# EAGLE board line-sensor-var1a-r3-2019-10-06 (EAGLE 9.5.1)
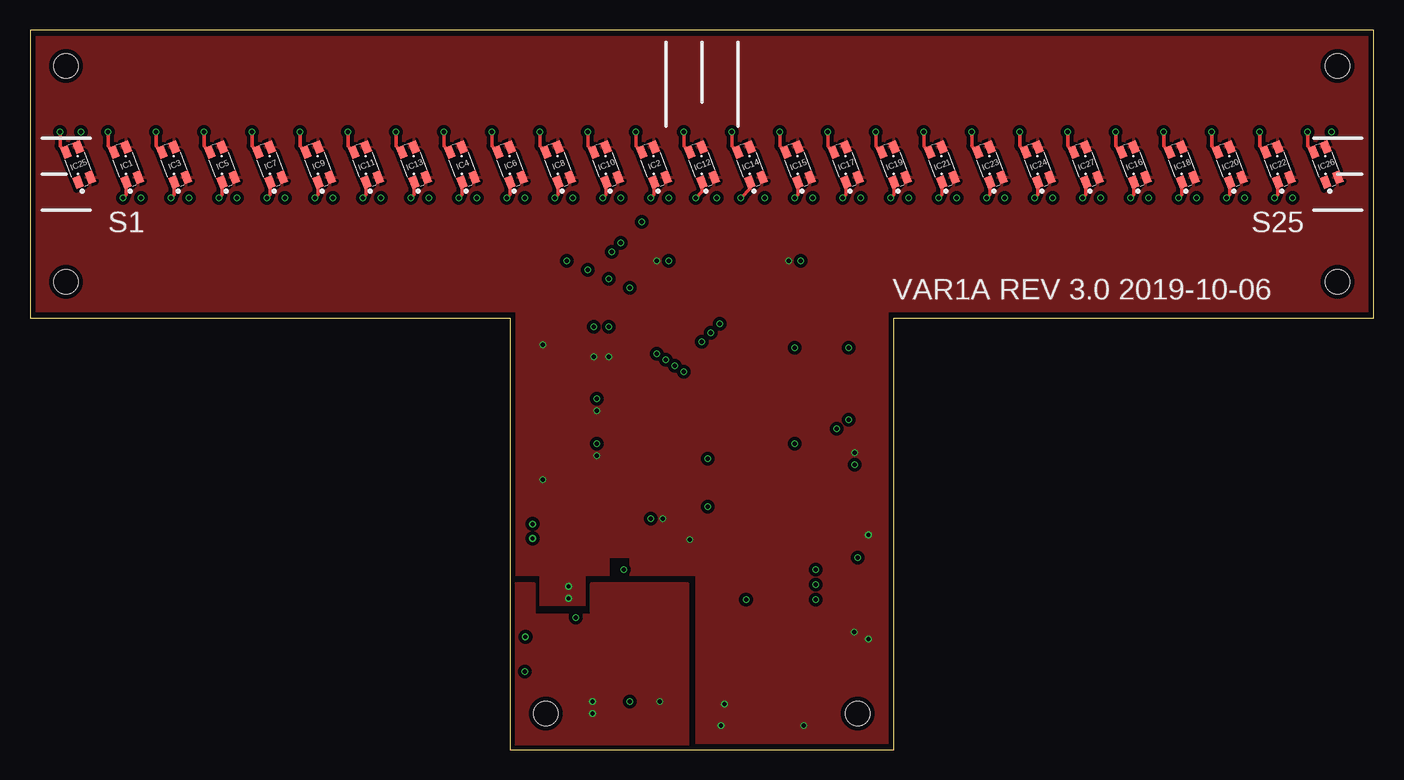
[diagram p0: board, top side]
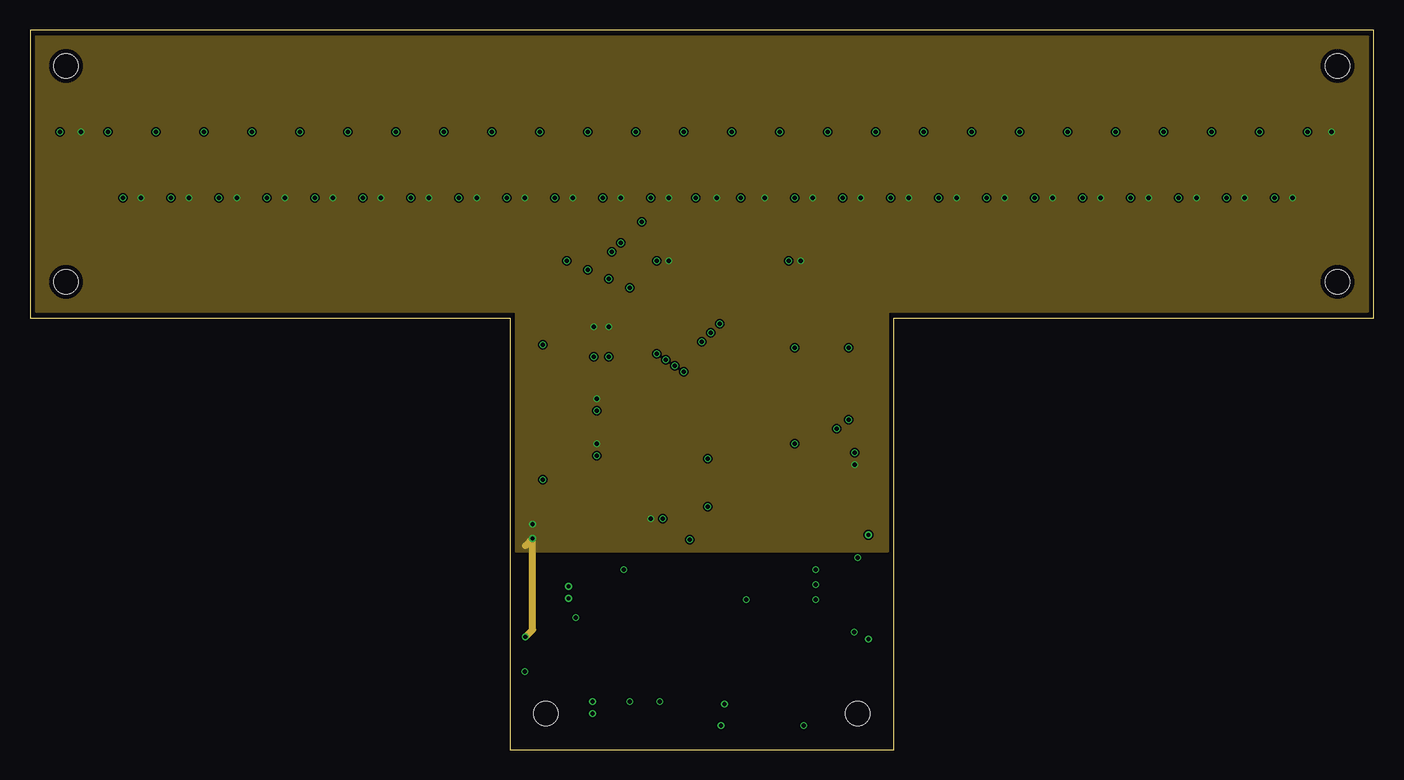
[diagram p1: board, inner layer Route2]
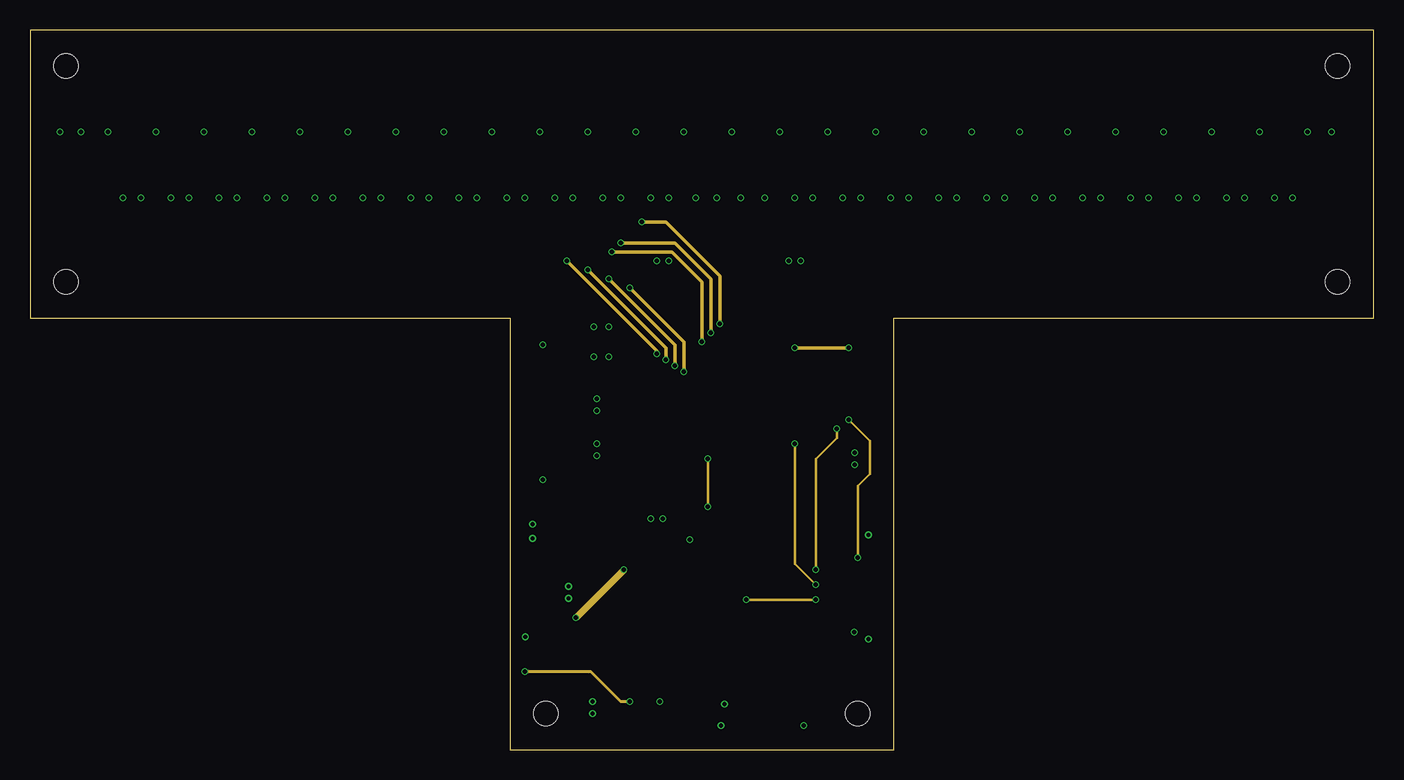
[diagram p2: board, inner layer Route15]
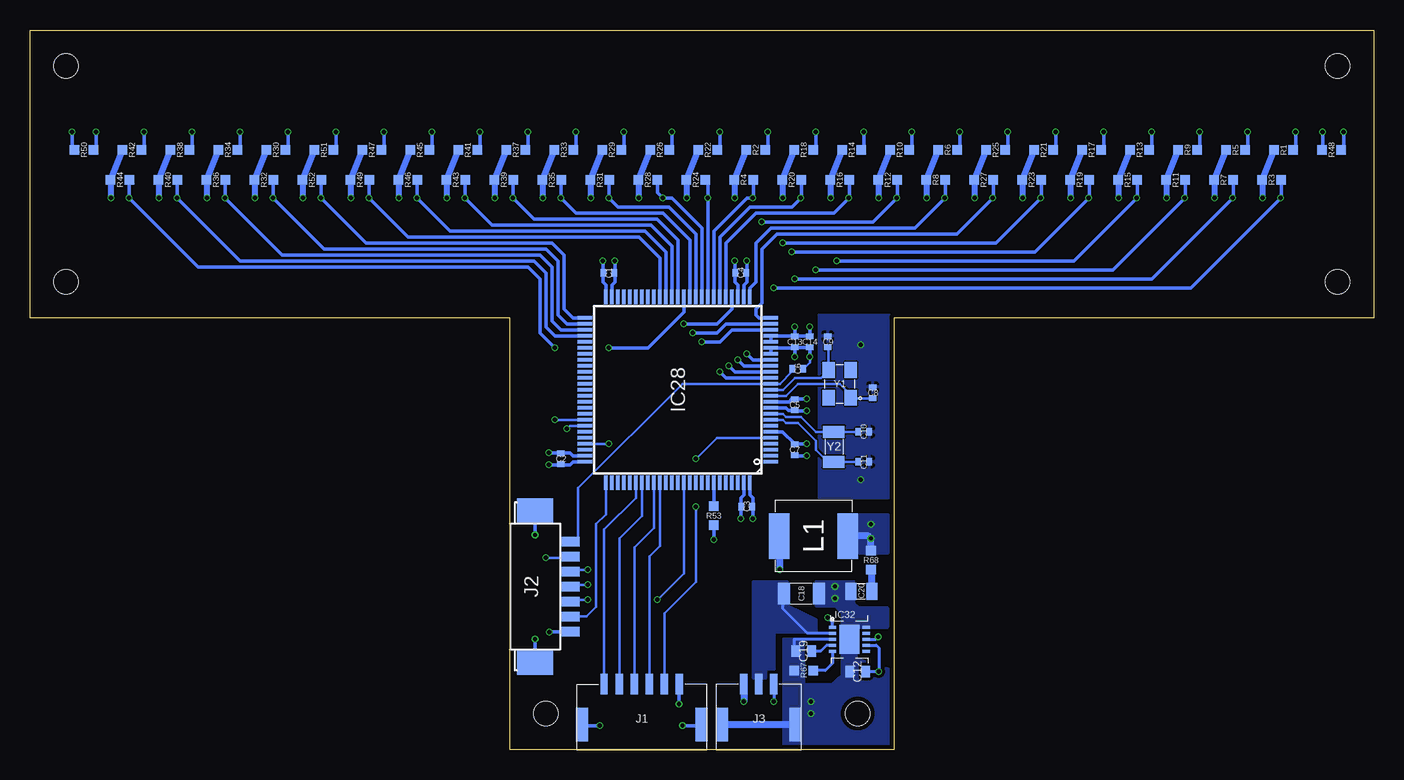
[diagram p3: board, bottom side, seen from below]

Size 112 x 60 mm. Coordinates in mm from the lower left corner, seen from the top.
Outline: 0,36 40,36 40,0 72,0 72,36 112,36 112,60 0,60 0,36
Copper layers (1*2*15*16): Top 0.035559375mm / dielectric 0.17018125mm / Route2 0.01778125mm / dielectric 47mil / Route15 0.01778125mm / dielectric 0.17018125mm / Bottom 0.035559375mm
Design rules "oshpark-4layer": minimum track width 5mil, minimum drill 10mil, track to track 5mil, track to pad 5mil, pad to pad 5mil, via to via 5mil, smd to smd 5mil, copper to edge 15mil, drill to drill 6mil, minimum pad ring 4mil, minimum via ring 4mil, stop-mask expansion 2.5mil, vias tented up to drill 0mil, thermal gap 10mil
Net classes: 1 ground: width 0.3 mm; 2 3v3: width 0.3 mm
Holes 2 mm at 3,57 3,39 109,57 109,39 43,3 69,3

## Footprints (pad centres in the part's own frame; a part is rotated, then mirrored left to right if it is on the bottom)
CAPACITOR-0402 = smd 0.47 x 0.6: P$1 -0.46,0; P$2 0.46,0
CAPACITOR-0603 = smd 0.7 x 0.95: 1 -0.675,0; 2 0.675,0
CAPACITOR-1206 = smd 1 x 1.8: P$1 -1.45,0; P$2 1.45,0
CAPACITOR-0805 = smd 0.9 x 1.4: 1 -0.875,0; 2 0.875,0
GP2S60 = smd 1 x 0.65: 1 -0.65,0.25; 2 -0.65,-0.85; 3 2.05,-0.85; 4 2.05,0.25
LQFP100_14X14 = smd 0.3 x 1.2: 1 -6,-7.75; 2 -5.5,-7.75; 3 -5,-7.75; 4 -4.5,-7.75; 5 -4,-7.75; 6 -3.5,-7.75; 7 -3,-7.75; 8 -2.5,-7.75; 9 -2,-7.75; 10 -1.5,-7.75; 11 -1,-7.75; 12 -0.5,-7.75; 13 0,-7.75; 14 0.5,-7.75; 15 1,-7.75; 16 1.5,-7.75; 17 2,-7.75; 18 2.5,-7.75; 19 3,-7.75; 20 3.5,-7.75; 21 4,-7.75; 22 4.5,-7.75; 23 5,-7.75; 24 5.5,-7.75; 25 6,-7.75; 51 6,7.75; 52 5.5,7.75; 53 5,7.75; 54 4.5,7.75; 55 4,7.75; 56 3.5,7.75; 57 3,7.75; 58 2.5,7.75; 59 2,7.75; 60 1.5,7.75; 61 1,7.75; 62 0.5,7.75; 63 0,7.75; 64 -0.5,7.75; 65 -1,7.75; 66 -1.5,7.75; 67 -2,7.75; 68 -2.5,7.75; 69 -3,7.75; 70 -3.5,7.75; 71 -4,7.75; 72 -4.5,7.75; 73 -5,7.75; 74 -5.5,7.75; 75 -6,7.75 | smd 1.2 x 0.3: 26 7.75,-6; 27 7.75,-5.5; 28 7.75,-5; 29 7.75,-4.5; 30 7.75,-4; 31 7.75,-3.5; 32 7.75,-3; 33 7.75,-2.5; 34 7.75,-2; 35 7.75,-1.5; 36 7.75,-1; 37 7.75,-0.5; 38 7.75,0; 39 7.75,0.5; 40 7.75,1; 41 7.75,1.5; 42 7.75,2; 43 7.75,2.5; 44 7.75,3; 45 7.75,3.5; 46 7.75,4; 47 7.75,4.5; 48 7.75,5; 49 7.75,5.5; 50 7.75,6; 76 -7.75,6; 77 -7.75,5.5; 78 -7.75,5; 79 -7.75,4.5; 80 -7.75,4; 81 -7.75,3.5; 82 -7.75,3; 83 -7.75,2.5; 84 -7.75,2; 85 -7.75,1.5; 86 -7.75,1; 87 -7.75,0.5; 88 -7.75,0; 89 -7.75,-0.5; 90 -7.75,-1; 91 -7.75,-1.5; 92 -7.75,-2; 93 -7.75,-2.5; 94 -7.75,-3; 95 -7.75,-3.5; 96 -7.75,-4; 97 -7.75,-4.5; 98 -7.75,-5; 99 -7.75,-5.5; 100 -7.75,-6
VSON-10-0.5MM = smd 0.6 x 0.24: 1 -1.4,1; 2 -1.4,0.5; 3 -1.4,0; 4 -1.4,-0.5; 5 -1.4,-1; 6 1.4,-1; 7 1.4,-0.5; 8 1.4,0; 9 1.4,0.5; 10 1.4,1 | smd 1.65 x 2.4: PAD 0,0
MOLEX-502382-06XX = smd 0.6 x 1.7: 1 -3.125,-5.45; 2 -1.875,-5.45; 3 -0.625,-5.45; 4 0.625,-5.45; 5 1.875,-5.45; 6 3.145,-5.45 | smd 1 x 2.8: G1 -4.975,-2.1; G2 4.975,-2.1
MOLEX-53261-0771 = smd 0.8 x 1.6: 1 -3.75,-0.8; 2 -2.5,-0.8; 3 -1.25,-0.8; 4 0,-0.8; 5 1.25,-0.8; 6 2.5,-0.8; 7 3.75,-0.8 | smd 2.1 x 3: G1 -6.3,-3.7; G2 6.3,-3.7
MOLEX-502382-03XX = smd 0.6 x 1.7: 1 -1.25,-5.45; 2 0,-5.45; 3 1.25,-5.45 | smd 1 x 2.8: G1 -3.05,-2.1; G2 3.05,-2.1
PANASONIC-SERIES-H = smd 1.7 x 3.8: 1 -2.85,0; 2 2.85,0
RESISTOR-0603 = smd 0.8 x 0.8: P$1 -0.8,0; P$2 0.8,0
KYOCERA-CX3225GB24000D0HEQ = smd 1.3 x 1.05: 1 -1.15,-0.925; 2 1.15,0.925; NC1 -1.15,0.925; NC2 1.15,-0.925
NDK-NX3215SA = smd 1 x 1.8: 1 -1.25,0; 2 1.25,0

## Placement (x,y rotation side)
C1  0.1u 10V X7R  [CAPACITOR-0402]  63.75,39.75 0 bottom
C2  0.1u 10V X7R  [CAPACITOR-0402]  67.75,24.25 90 bottom
C3  0.1u 10V X7R  [CAPACITOR-0402]  52.25,20.25 180 bottom
C4  0.1u 10V X7R  [CAPACITOR-0402]  52.75,39.75 0 bottom
C5  0.1u 10V X7R  [CAPACITOR-0402]  48.25,28.75 270 bottom
C6  0.1u 10V X7R  [CAPACITOR-0402]  48,31.75 0 bottom
C7  0.1u 10V X7R  [CAPACITOR-0402]  48.25,25 270 bottom
C8  6p  [CAPACITOR-0402]  41.75,29.75 90 bottom
C9  6p  [CAPACITOR-0402]  45.5,34 90 bottom
C10  2p  [CAPACITOR-0402]  42.5,26.5 0 bottom
C11  2p  [CAPACITOR-0402]  42.5,24 0 bottom
C12  1u 16V X7R  [CAPACITOR-0603]  43,6.5 180 bottom
C13  0.1u 10V X7R  [CAPACITOR-0402]  48.25,34 270 bottom
C14  1u 10V X7R  [CAPACITOR-0402]  47,34 270 bottom
C18  1u 50V X7R  [CAPACITOR-1206]  47.7,13 0 bottom
C19  33n 10V X7R  [CAPACITOR-0603]  47.5,8.2 180 bottom
C20  22u 10V X7S  [CAPACITOR-0805]  42.7,13.2 180 bottom
IC1  GP2S60  [GP2S60]  8,48 111.8 top
IC2  GP2S60  [GP2S60]  52,48 111.8 top
IC3  GP2S60  [GP2S60]  12,48 111.8 top
IC4  GP2S60  [GP2S60]  36,48 111.8 top
IC5  GP2S60  [GP2S60]  16,48 111.8 top
IC6  GP2S60  [GP2S60]  40,48 111.8 top
IC7  GP2S60  [GP2S60]  20,48 111.8 top
IC8  GP2S60  [GP2S60]  44,48 111.8 top
IC9  GP2S60  [GP2S60]  24,48 111.8 top
IC10  GP2S60  [GP2S60]  48,48 111.8 top
IC11  GP2S60  [GP2S60]  28,48 111.8 top
IC12  GP2S60  [GP2S60]  56,48 111.8 top
IC13  GP2S60  [GP2S60]  32,48 111.8 top
IC14  GP2S60  [GP2S60]  60,48 111.8 top
IC15  GP2S60  [GP2S60]  64,48 111.8 top
IC16  GP2S60  [GP2S60]  92,48 111.8 top
IC17  GP2S60  [GP2S60]  68,48 111.8 top
IC18  GP2S60  [GP2S60]  96,48 111.8 top
IC19  GP2S60  [GP2S60]  72,48 111.8 top
IC20  GP2S60  [GP2S60]  100,48 111.8 top
IC21  GP2S60  [GP2S60]  76,48 111.8 top
IC22  GP2S60  [GP2S60]  104,48 111.8 top
IC23  GP2S60  [GP2S60]  80,48 111.8 top
IC24  GP2S60  [GP2S60]  84,48 111.8 top
IC25  GP2S60  [GP2S60]  4,48 111.8 top
IC26  GP2S60  [GP2S60]  108,48 111.8 top
IC27  GP2S60  [GP2S60]  88,48 111.8 top
IC28  STM32L151VE  [LQFP100_14X14]  58,30 90 bottom
IC32  LM5165YDRCR  [VSON-10-0.5MM]  43.7,9.2 0 bottom
J1  MOLEX-502382-06XX  [MOLEX-502382-06XX]  61,0 180 bottom
J2  MOLEX-53261-0771  [MOLEX-53261-0771]  66.2,13.6 270 bottom
J3  MOLEX-502382-03XX  [MOLEX-502382-03XX]  51.25,0 180 bottom
L1  150u 0.86R 0.35A  [PANASONIC-SERIES-H]  46.7,17.8 0 bottom
R1  1.5k  [RESISTOR-0603]  7.5,50 180 bottom
R2  1.5k  [RESISTOR-0603]  51.5,50 180 bottom
R3  220k  [RESISTOR-0603]  8.5,47.5 180 bottom
R4  220k  [RESISTOR-0603]  52.5,47.5 180 bottom
R5  1.5k  [RESISTOR-0603]  11.5,50 180 bottom
R6  1.5k  [RESISTOR-0603]  35.5,50 180 bottom
R7  220k  [RESISTOR-0603]  12.5,47.5 180 bottom
R8  220k  [RESISTOR-0603]  36.5,47.5 180 bottom
R9  1.5k  [RESISTOR-0603]  15.5,50 180 bottom
R10  1.5k  [RESISTOR-0603]  39.5,50 180 bottom
R11  220k  [RESISTOR-0603]  16.5,47.5 180 bottom
R12  220k  [RESISTOR-0603]  40.5,47.5 180 bottom
R13  1.5k  [RESISTOR-0603]  19.5,50 180 bottom
R14  1.5k  [RESISTOR-0603]  43.5,50 180 bottom
R15  220k  [RESISTOR-0603]  20.5,47.5 180 bottom
R16  220k  [RESISTOR-0603]  44.5,47.5 180 bottom
R17  1.5k  [RESISTOR-0603]  23.5,50 180 bottom
R18  1.5k  [RESISTOR-0603]  47.5,50 180 bottom
R19  220k  [RESISTOR-0603]  24.5,47.5 180 bottom
R20  220k  [RESISTOR-0603]  48.5,47.5 180 bottom
R21  1.5k  [RESISTOR-0603]  27.5,50 180 bottom
R22  1.5k  [RESISTOR-0603]  55.5,50 180 bottom
R23  220k  [RESISTOR-0603]  28.5,47.5 180 bottom
R24  220k  [RESISTOR-0603]  56.5,47.5 180 bottom
R25  1.5k  [RESISTOR-0603]  31.5,50 180 bottom
R26  1.5k  [RESISTOR-0603]  59.5,50 180 bottom
R27  220k  [RESISTOR-0603]  32.5,47.5 180 bottom
R28  220k  [RESISTOR-0603]  60.5,47.5 180 bottom
R29  1.5k  [RESISTOR-0603]  63.5,50 180 bottom
R30  1.5k  [RESISTOR-0603]  91.5,50 180 bottom
R31  220k  [RESISTOR-0603]  64.5,47.5 180 bottom
R32  220k  [RESISTOR-0603]  92.5,47.5 180 bottom
R33  1.5k  [RESISTOR-0603]  67.5,50 180 bottom
R34  1.5k  [RESISTOR-0603]  95.5,50 180 bottom
R35  220k  [RESISTOR-0603]  68.5,47.5 180 bottom
R36  220k  [RESISTOR-0603]  96.5,47.5 180 bottom
R37  1.5k  [RESISTOR-0603]  71.5,50 180 bottom
R38  1.5k  [RESISTOR-0603]  99.5,50 180 bottom
R39  220k  [RESISTOR-0603]  72.5,47.5 180 bottom
R40  220k  [RESISTOR-0603]  100.5,47.5 180 bottom
R41  1.5k  [RESISTOR-0603]  75.5,50 180 bottom
R42  1.5k  [RESISTOR-0603]  103.5,50 180 bottom
R43  220k  [RESISTOR-0603]  76.5,47.5 180 bottom
R44  220k  [RESISTOR-0603]  104.5,47.5 180 bottom
R45  1.5k  [RESISTOR-0603]  79.5,50 180 bottom
R46  220k  [RESISTOR-0603]  80.5,47.5 180 bottom
R47  1.5k  [RESISTOR-0603]  83.5,50 180 bottom
R48  1.5k  [RESISTOR-0603]  3.5,50 180 bottom
R49  220k  [RESISTOR-0603]  84.5,47.5 180 bottom
R50  1.5k  [RESISTOR-0603]  107.5,50 180 bottom
R51  1.5k  [RESISTOR-0603]  87.5,50 180 bottom
R52  220k  [RESISTOR-0603]  88.5,47.5 180 bottom
R53  100k  [RESISTOR-0603]  55,19.5 270 bottom
R67  121k 1%  [RESISTOR-0603]  47.5,6.6 180 bottom
R68  0.5 5%  [RESISTOR-0603]  41.9,15.8 270 bottom
Y1  CRYSTALKYOCERA-CX3225GB24000D0HEQ  [KYOCERA-CX3225GB24000D0HEQ]  44.5,30.5 90 bottom
Y2  CRYSTALNDK-NX3215SA  [NDK-NX3215SA]  45,25.25 270 bottom

## Library data of the parts
C1-C10 C12-C14 C18-C20 L1 R1-R53 R67 R68 Y1 Y2 = passives
C11 = passives; SPICEPREFIX: C
IC1-IC27 = sensors
IC28 = mcu
IC32 = voltage-regulator
J1-J3 = connectors

## Nets
!RST: C6.P$1 IC28.14 J2.1
BOOT0: IC28.94 R53.P$1
GND: C1.P$2 C2.P$2 C3.P$2 C4.P$2 C5.P$2 C6.P$2 C7.P$2 C8.P$2 C9.P$2 C10.P$2 C11.P$2 C12.2 C13.P$2 C14.P$2 C18.P$2 C19.2 C20.2 IC1.2 IC1.3 IC2.2 IC2.3 IC3.2 IC3.3 IC4.2 IC4.3 IC5.2 IC5.3 IC6.2 IC6.3 IC7.2 IC7.3 IC8.2 IC8.3 IC9.2 IC9.3 IC10.2 IC10.3 IC11.2 IC11.3 IC12.2 IC12.3 IC13.2 IC13.3 IC14.2 IC14.3 IC15.2 IC15.3 IC16.2 IC16.3 IC17.2 IC17.3 IC18.2 IC18.3 IC19.2 IC19.3 IC20.2 IC20.3 IC21.2 IC21.3 IC22.2 IC22.3 IC23.2 IC23.3 IC24.2 IC24.3 IC25.2 IC25.3 IC26.2 IC26.3 IC27.2 IC27.3 IC28.10 IC28.19 IC28.20 IC28.27 IC28.49 IC28.74 IC28.99 IC32.3 IC32.10 IC32.PAD J1.1 J1.G1 J1.G2 J2.7 J2.G1 J2.G2 J3.3 J3.G1 J3.G2 R53.P$2 R67.P$2
IC32_SW: IC32.1 L1.1
N$1: IC3.4 R5.P$1
N$2: IC1.4 R1.P$1
N$3: IC5.4 R9.P$1
N$4: IC7.4 R13.P$1
N$5: IC9.4 R17.P$1
N$6: IC11.4 R21.P$1
N$7: IC13.4 R25.P$1
N$8: IC4.4 R6.P$1
N$9: IC6.4 R10.P$1
N$10: IC8.4 R14.P$1
N$11: IC10.4 R18.P$1
N$12: IC2.4 R2.P$1
N$13: IC12.4 R22.P$1
N$14: IC14.4 R26.P$1
N$15: IC15.4 R29.P$1
N$16: IC17.4 R33.P$1
N$17: IC19.4 R37.P$1
N$18: IC21.4 R41.P$1
N$19: IC23.4 R45.P$1
N$20: IC24.4 R47.P$1
N$21: IC27.4 R51.P$1
N$22: IC16.4 R30.P$1
N$23: IC18.4 R34.P$1
N$24: IC20.4 R38.P$1
N$25: IC22.4 R42.P$1
N$30: IC26.4 R50.P$1
N$31: IC25.4 R48.P$1
N$33: C8.P$1 IC28.12 Y1.1
N$34: C9.P$1 IC28.13 Y1.2
N$35: IC32.5 R67.P$1
N$36: C10.P$1 IC28.9 Y2.1
N$37: C11.P$1 IC28.8 Y2.2
N$40: C19.1 IC32.4
N$42: C20.1 R68.P$2
PWR_ENABLE: C12.1 IC32.7 J3.1
SENSOR_1: IC1.1 IC28.15 R3.P$1
SENSOR_2: IC3.1 IC28.16 R7.P$1
SENSOR_3: IC5.1 IC28.17 R11.P$1
SENSOR_4: IC7.1 IC28.18 R15.P$1
SENSOR_5: IC9.1 IC28.23 R19.P$1
SENSOR_6: IC11.1 IC28.24 R23.P$1
SENSOR_7: IC13.1 IC28.25 R27.P$1
SENSOR_8: IC4.1 IC28.26 R8.P$1
SENSOR_9: IC6.1 IC28.29 R12.P$1
SENSOR_10: IC8.1 IC28.30 R16.P$1
SENSOR_11: IC10.1 IC28.31 R20.P$1
SENSOR_12: IC2.1 IC28.32 R4.P$1
SENSOR_13: IC12.1 IC28.33 R24.P$1
SENSOR_14: IC14.1 IC28.34 R28.P$1
SENSOR_15: IC15.1 IC28.35 R31.P$1
SENSOR_16: IC17.1 IC28.36 R35.P$1
SENSOR_17: IC19.1 IC28.38 R39.P$1
SENSOR_18: IC21.1 IC28.39 R43.P$1
SENSOR_19: IC23.1 IC28.40 R46.P$1
SENSOR_20: IC24.1 IC28.41 R49.P$1
SENSOR_21: IC27.1 IC28.51 R52.P$1
SENSOR_22: IC16.1 IC28.52 R32.P$1
SENSOR_23: IC18.1 IC28.53 R36.P$1
SENSOR_24: IC20.1 IC28.54 R40.P$1
SENSOR_25: IC22.1 IC28.37 R44.P$1
SPI2_!SS: IC28.81 J1.6
SPI2_MISO: IC28.84 J1.4
SPI2_MOSI: IC28.85 J1.3
SPI2_SCK: IC28.82 J1.5
STLINK_SWO: IC28.89 J2.5
STLINK_TCK: IC28.76 J2.6
STLINK_TMS: IC28.72 J2.4
STLINK_USART1_RX: IC28.69 J2.3
STLINK_USART1_TX: IC28.68 J2.2
VBAT: C18.P$1 IC32.2 J3.2
VDD: C1.P$1 C2.P$1 C3.P$1 C4.P$1 C5.P$1 C7.P$1 C13.P$1 C14.P$1 IC28.6 IC28.11 IC28.21 IC28.22 IC28.28 IC28.50 IC28.75 IC28.100 IC32.8 L1.2 R1.P$2 R2.P$2 R3.P$2 R4.P$2 R5.P$2 R6.P$2 R7.P$2 R8.P$2 R9.P$2 R10.P$2 R11.P$2 R12.P$2 R13.P$2 R14.P$2 R15.P$2 R16.P$2 R17.P$2 R18.P$2 R19.P$2 R20.P$2 R21.P$2 R22.P$2 R23.P$2 R24.P$2 R25.P$2 R26.P$2 R27.P$2 R28.P$2 R29.P$2 R30.P$2 R31.P$2 R32.P$2 R33.P$2 R34.P$2 R35.P$2 R36.P$2 R37.P$2 R38.P$2 R39.P$2 R40.P$2 R41.P$2 R42.P$2 R43.P$2 R44.P$2 R45.P$2 R46.P$2 R47.P$2 R48.P$2 R49.P$2 R50.P$2 R51.P$2 R52.P$2 R68.P$1
WAKEUP: IC28.5 J1.2

## Tracks (layer width: path | path; a pad name or v marks a point on that pad's centre or on a via)
!RST
  Bottom 0.2: C6.P$1 48.46,31.54 49.5,30.5 IC28.14 57.6,30.5 66.3,21.8 66.3,17.3 66.95,17.3 J2.1
BOOT0
  Bottom 0.3: IC28.94 R53.P$1
GND  (via drill 0.35)
  Bottom 0.2: C6.P$2 47,32.29 v47,32.75
  Bottom 0.24: C19.2 48.3,8.25 48.3,9.2 IC32.3
  Bottom 0.3: v52.75,19.25 52.75,20.21 C3.P$2 52.75,20.29 52.75,21 52.5,21.25 IC28.99 | R53.P$2 v55,17.5 | IC28.74 66.75,24.5 67,24.75 67.71,24.75 C2.P$2 67.79,24.75 v68.75,24.75 | IC28.19 IC28.20 48.29,33.5 C13.P$2 | C13.P$2 C14.P$2 v47,32.75 | v47.25,28.25 48.21,28.25 C5.P$2 48.79,28.29 49,28.5 IC28.10 | C13.P$2 v48.25,32.75 | C7.P$2 48.21,24.5 v47.25,24.5 | J1.1 57.9,5.43 v57.9,3.8 | J1.G1 56.12,2 v57.6,2 | J1.G2 65.88,2 v64.5,2 | J2.G2 v69.9,9.2 | J2.7 67.05,9.8 v68.7,9.8 | J2.G1 v69.9,17.9 | IC28.27 52.5,38.75 52.25,39 52.25,39.71 C4.P$2 52.25,39.79 v52.25,40.75 | IC28.49 63.5,38.75 63.25,39 63.25,39.71 C1.P$2 63.25,39.79 v63.25,40.75
  Bottom 0.6: J3.G2 J3.G1 | J3.3 v52.5,4
  other vias: 44.9,12.6 44.9,13.6 46.9,4 46.9,3 42.75,33.75 42.75,22.5
  pour Bottom (isolate 0.24, no thermals): 47.5,9.2 49.2,9.2 49.2,0.2 40.2,0.2 40.2,6.6 43.1,7.57 43.1,8.2 44.3,8.2 44.3,6.19 45.2,5.4 47.5,5.4
  pour Bottom (no thermals): 44.3,10.2 40.5,10.2 40.5,11.8 42.9,11.8 43.3,12.2 43.3,14 46.5,14 46.5,12 44.9,12 44.3,11.4
  pour Top (isolate 0.3): 40.2,0.2 54.8,0.2 54.8,13.8 49.2,13.8 46.8,13.8 46.8,11.2 42,11.2 42,13.8 40.2,13.8
  pour Top (isolate 0.3): 111.5,59.5 111.5,36.5 71.5,36.5 71.5,0.5 55.5,0.5 55.5,14.5 50,14.5 50,16 48.25,16 48.25,14.5 46.25,14.5 46.25,12 42.5,12 42.5,14.5 40.5,14.5 40.5,36.5 0.5,36.5 0.5,59.5
  pour Bottom: 46.25,36.25 40.25,36.25 40.25,21 46.25,21
IC32_SW  (via drill 0.35)
  Route15 0.6: v49.5,15 v45.5,11
  Bottom 0.24: IC32.1 45.1,10.6 v45.5,11
  Bottom 0.6: v49.5,15 49.5,17.75 L1.1
N$1  (via drill 0.35)
  Top 0.3: v10.5,51.5 10.5,50.32 IC3.4
  Bottom 0.3: R5.P$1 10.5,50.2 v10.5,51.5
N$2  (via drill 0.35)
  Top 0.3: v6.5,51.5 6.5,50.32 IC1.4
  Bottom 0.3: R1.P$1 6.5,50.2 v6.5,51.5
N$3  (via drill 0.35)
  Top 0.3: v14.5,51.5 14.5,50.32 IC5.4
  Bottom 0.3: R9.P$1 14.5,50.2 v14.5,51.5
N$4  (via drill 0.35)
  Top 0.3: v18.5,51.5 18.5,50.32 IC7.4
  Bottom 0.3: R13.P$1 18.5,50.2 v18.5,51.5
N$5  (via drill 0.35)
  Top 0.3: v22.5,51.5 22.5,50.32 IC9.4
  Bottom 0.3: R17.P$1 22.5,50.2 v22.5,51.5
N$6  (via drill 0.35)
  Top 0.3: v26.5,51.5 26.5,50.32 IC11.4
  Bottom 0.3: R21.P$1 26.5,50.2 v26.5,51.5
N$7  (via drill 0.35)
  Top 0.3: v30.5,51.5 30.5,50.32 IC13.4
  Bottom 0.3: R25.P$1 30.5,50.2 v30.5,51.5
N$8  (via drill 0.35)
  Top 0.3: v34.5,51.5 34.5,50.32 IC4.4
  Bottom 0.3: R6.P$1 34.5,50.2 v34.5,51.5
N$9  (via drill 0.35)
  Top 0.3: v38.5,51.5 38.5,50.32 IC6.4
  Bottom 0.3: R10.P$1 38.5,50.2 v38.5,51.5
N$10  (via drill 0.35)
  Top 0.3: v42.5,51.5 42.5,50.32 IC8.4
  Bottom 0.3: R14.P$1 42.5,50.2 v42.5,51.5
N$11  (via drill 0.35)
  Top 0.3: v46.5,51.5 46.5,50.32 IC10.4
  Bottom 0.3: R18.P$1 46.5,50.2 v46.5,51.5
N$12  (via drill 0.35)
  Top 0.3: v50.5,51.5 50.5,50.32 IC2.4
  Bottom 0.3: R2.P$1 50.5,50.2 v50.5,51.5
N$13  (via drill 0.35)
  Top 0.3: v54.5,51.5 54.5,50.32 IC12.4
  Bottom 0.3: R22.P$1 54.5,50.2 v54.5,51.5
N$14  (via drill 0.35)
  Top 0.3: v58.5,51.5 58.5,50.32 IC14.4
  Bottom 0.3: R26.P$1 58.5,50.2 v58.5,51.5
N$15  (via drill 0.35)
  Top 0.3: v62.5,51.5 62.5,50.32 IC15.4
  Bottom 0.3: R29.P$1 62.5,50.2 v62.5,51.5
N$16  (via drill 0.35)
  Top 0.3: v66.5,51.5 66.5,50.32 IC17.4
  Bottom 0.3: R33.P$1 66.5,50.2 v66.5,51.5
N$17  (via drill 0.35)
  Top 0.3: v70.5,51.5 70.5,50.32 IC19.4
  Bottom 0.3: R37.P$1 70.5,50.2 v70.5,51.5
N$18  (via drill 0.35)
  Top 0.3: v74.5,51.5 74.5,50.32 IC21.4
  Bottom 0.3: R41.P$1 74.5,50.2 v74.5,51.5
N$19  (via drill 0.35)
  Top 0.3: v78.5,51.5 78.5,50.32 IC23.4
  Bottom 0.3: R45.P$1 78.5,50.2 v78.5,51.5
N$20  (via drill 0.35)
  Top 0.3: v82.5,51.5 82.5,50.32 IC24.4
  Bottom 0.3: R47.P$1 82.5,50.2 v82.5,51.5
N$21  (via drill 0.35)
  Top 0.3: v86.5,51.5 86.5,50.32 IC27.4
  Bottom 0.3: R51.P$1 86.5,50.2 v86.5,51.5
N$22  (via drill 0.35)
  Top 0.3: v90.5,51.5 90.5,50.32 IC16.4
  Bottom 0.3: R30.P$1 90.5,50.2 v90.5,51.5
N$23  (via drill 0.35)
  Top 0.3: v94.5,51.5 94.5,50.32 IC18.4
  Bottom 0.3: R34.P$1 94.5,50.2 v94.5,51.5
N$24  (via drill 0.35)
  Top 0.3: v98.5,51.5 98.5,50.32 IC20.4
  Bottom 0.3: R38.P$1 98.5,50.2 v98.5,51.5
N$25  (via drill 0.35)
  Top 0.3: v102.5,51.5 102.5,50.32 IC22.4
  Bottom 0.3: R42.P$1 102.5,50.2 v102.5,51.5
N$30  (via drill 0.35)
  Top 0.3: v106.5,51.5 106.5,50.32 IC26.4
  Bottom 0.3: R50.P$1 106.5,50.2 v106.5,51.5
N$31  (via drill 0.35)
  Top 0.3: v2.5,51.5 2.5,50.32 IC25.4
  Bottom 0.3: R48.P$1 2.5,50.2 v2.5,51.5
N$33
  Bottom 0.2: IC28.12 49,29.5 48,30.5 44.5,30.5 43.58,29.58 Y1.1 43.52,29.29 C8.P$1
N$34
  Bottom 0.2: IC28.13 49.25,30 48.25,31 46.08,31 Y1.2 45.42,33.47 C9.P$1
N$35
  Bottom 0.24: IC32.5 45.1,7.2 45.7,6.6 R67.P$1
N$36
  Bottom 0.2: IC28.9 49.25,28 49,27.75 47.75,27.75 46.5,26.5 Y2.1 C10.P$1
N$37
  Bottom 0.2: IC28.8 49.25,27.5 49,27.25 48,27.25 46.5,25.75 46.5,25 45.5,24 Y2.2 C11.P$1
N$40
  Bottom 0.24: IC32.4 45.6,8.7 46.1,8.2 C19.1
N$42
  Bottom 0.6: C20.1 41.83,14.93 R68.P$2
PWR_ENABLE  (via drill 0.35)
  Route15 0.24: v50,4 49.25,4 46.75,6.5 v41.25,6.5
  Bottom 0.24: IC32.7 41.45,8.7 41.25,8.5 v41.25,6.5 C12.1 | J3.1 v50,4
SENSOR_1  (via drill 0.35)
  Top 0.3: v7.75,46 8.01,46.26 IC1.1
  Route15 0.3: v54.5,31.5 54.5,34 v50,38.5
  Bottom 0.3: v54.5,31.5 54,31 IC28.15 | v50,38.5 15.25,38.5 v7.75,46 7.7,46.05 R3.P$1
SENSOR_2  (via drill 0.35)
  Top 0.3: v11.75,46 12.01,46.26 IC3.1
  Route15 0.3: v53.75,32 53.75,33.75 v48.25,39.25
  Bottom 0.3: v53.75,32 53.25,31.5 IC28.16 | v48.25,39.25 18.5,39.25 v11.75,46 11.7,46.05 R7.P$1
SENSOR_3  (via drill 0.35)
  Top 0.3: v15.75,46 16.01,46.26 IC5.1
  Route15 0.3: v53,32.5 53,33.5 v46.5,40
  Bottom 0.3: v53,32.5 52.5,32 IC28.17 | v46.5,40 21.75,40 v15.75,46 15.7,46.05 R11.P$1
SENSOR_4  (via drill 0.35)
  Top 0.3: v19.75,46 20.01,46.26 IC7.1
  Route15 0.3: v52.25,33 52.25,33.25 v44.75,40.75
  Bottom 0.3: IC28.18 51.75,32.5 v52.25,33 | v44.75,40.75 25,40.75 v19.75,46 19.7,46.05 R15.P$1
SENSOR_5  (via drill 0.35)
  Top 0.3: v23.75,46 24.01,46.26 IC9.1
  Route15 0.3: v48.5,41.5 53.5,41.5 56,39 v56,34
  Bottom 0.3: IC28.23 53.5,35 54.5,34 v56,34 | v48.5,41.5 28.25,41.5 v23.75,46 23.7,46.05 R19.P$1
SENSOR_6  (via drill 0.35)
  Top 0.3: v27.75,46 28.01,46.26 IC11.1
  Route15 0.3: v49.25,42.25 53.75,42.25 56.75,39.25 v56.75,34.75
  Bottom 0.3: v56.75,34.75 54.75,34.75 54,35.5 IC28.24 | v49.25,42.25 31.5,42.25 v27.75,46 27.7,46.05 R23.P$1
SENSOR_7  (via drill 0.35)
  Top 0.3: v31.75,46 32.01,46.26 IC13.1
  Bottom 0.3: IC28.25 51.25,36 51.5,36.25 51.5,36.75 51,37.25 51,41.75 49.75,43 34.75,43 v31.75,46 31.7,46.05 R27.P$1
SENSOR_8  (via drill 0.35)
  Top 0.3: v35.75,46 36.01,46.26 IC4.1
  Bottom 0.3: IC28.26 52,38.5 51.5,39 51.5,42.25 50.25,43.5 38.25,43.5 v35.75,46 35.7,46.05 R8.P$1
SENSOR_9  (via drill 0.35)
  Top 0.3: v39.75,46 40.01,46.26 IC6.1
  Route15 0.3: v57.5,35.5 57.5,39.5 53,44 v51,44
  Bottom 0.3: v57.5,35.5 54.75,35.5 53.5,36.75 IC28.29 | v51,44 41.75,44 v39.75,46 39.7,46.05 R12.P$1
SENSOR_10  (via drill 0.35)
  Top 0.3: v43.75,46 44.01,46.26 IC8.1
  Bottom 0.3: R16.P$1 43.7,46.05 v43.75,46 45,44.75 51.5,44.75 54,42.25 IC28.30
SENSOR_11  (via drill 0.35)
  Top 0.3: v47.75,46 48.01,46.26 IC10.1
  Bottom 0.3: IC28.31 54.5,42.75 52,45.25 48.5,45.25 v47.75,46 47.7,46.05 R20.P$1
SENSOR_12  (via drill 0.35)
  Top 0.3: v51.75,46 52.01,46.26 IC2.1
  Bottom 0.3: IC28.32 55,43.25 52.25,46 v51.75,46 51.7,46.05 R4.P$1
SENSOR_13  (via drill 0.35)
  Top 0.3: v55.5,46 56.01,46.51 IC12.1
  Bottom 0.3: IC28.33 v55.5,46 55.5,47.3 R24.P$1
SENSOR_14  (via drill 0.35)
  Top 0.3: v59.25,46 60.01,46.76 IC14.1
  Bottom 0.3: IC28.34 56,43.5 58.5,46 v59.25,46 59.7,46.45 R28.P$1
SENSOR_15  (via drill 0.35)
  Top 0.3: v63.75,46 64.01,46.26 IC15.1
  Bottom 0.3: IC28.35 56.5,43 58.75,45.25 63,45.25 v63.75,46 63.75,47.45 R31.P$1
SENSOR_16  (via drill 0.35)
  Top 0.3: v67.75,46 68.01,46.26 IC17.1
  Bottom 0.3: R35.P$1 67.75,47.45 v67.75,46 66.5,44.75 59.25,44.75 57,42.5 IC28.36
SENSOR_17  (via drill 0.35)
  Top 0.3: v71.75,46 72.01,46.26 IC19.1
  Bottom 0.3: IC28.38 58,42.5 59.75,44.25 70,44.25 v71.75,46 71.75,47.45 R39.P$1
SENSOR_18  (via drill 0.35)
  Top 0.3: v75.75,46 76.01,46.26 IC21.1
  Bottom 0.3: IC28.39 58.5,42 60.25,43.75 73.5,43.75 v75.75,46 75.75,47.45 R43.P$1
SENSOR_19  (via drill 0.35)
  Top 0.3: v79.75,46 80.01,46.26 IC23.1
  Bottom 0.3: IC28.40 59,41.5 60.75,43.25 77,43.25 v79.75,46 79.75,47.45 R46.P$1
SENSOR_20  (via drill 0.35)
  Top 0.3: v83.75,46 84.01,46.26 IC24.1
  Bottom 0.3: IC28.41 59.5,41 61.25,42.75 80.5,42.75 v83.75,46 83.75,47.45 R49.P$1
SENSOR_21  (via drill 0.35)
  Top 0.3: v87.75,46 88.01,46.26 IC27.1
  Bottom 0.3: IC28.51 66.75,36 67.5,36.75 67.5,41.25 68.5,42.25 84,42.25 v87.75,46 87.75,47.45 R52.P$1
SENSOR_22  (via drill 0.35)
  Top 0.3: v91.75,46 92.01,46.26 IC16.1
  Bottom 0.3: IC28.52 67.25,35.5 68,36.25 68,40.75 69,41.75 87.5,41.75 v91.75,46 91.75,47.45 R32.P$1
SENSOR_23  (via drill 0.35)
  Top 0.3: v95.75,46 96.01,46.26 IC18.1
  Bottom 0.3: R36.P$1 95.75,47.45 v95.75,46 91,41.25 69.5,41.25 68.5,40.25 68.5,35.75 67.75,35 IC28.53
SENSOR_24  (via drill 0.35)
  Top 0.3: v99.75,46 100.01,46.26 IC20.1
  Bottom 0.3: R40.P$1 99.75,47.45 v99.75,46 94.5,40.75 70,40.75 69,39.75 69,35.25 68.25,34.5 IC28.54
SENSOR_25  (via drill 0.35)
  Top 0.3: v103.75,46 104.01,46.26 IC22.1
  Route15 0.3: v63.75,33.5 v68.25,33.5
  Bottom 0.3: IC28.37 57.5,36.5 60.5,33.5 v63.75,33.5 | v68.25,33.5 69.5,34.75 69.5,39.25 70.5,40.25 98,40.25 v103.75,46 103.75,47.45 R44.P$1
SPI2_!SS
  Bottom 0.2: J1.6 64.14,18.35 61.5,21 IC28.81
SPI2_MISO
  Bottom 0.2: J1.4 61.62,16.88 60,18.5 IC28.84
SPI2_MOSI
  Bottom 0.2: IC28.85 59.5,17 60.38,16.12 J1.3
SPI2_SCK
  Bottom 0.2: J1.5 62.88,17.62 61,19.5 IC28.82
STLINK_SWO  (via drill 0.35)
  Route15 0.2: v65.5,12.5 v59.7,12.5
  Bottom 0.2: J2.5 66.85,12.5 v65.5,12.5 | IC28.89 57.5,14.7 v59.7,12.5
STLINK_TCK
  Bottom 0.2: J2.6 65.6,11.1 64.8,11.9 64.8,18.8 64,19.6 IC28.76
STLINK_TMS  (via drill 0.35)
  Route15 0.2: v65.5,13.75 63.75,15.5 v63.75,25.5
  Bottom 0.2: J2.4 66.85,13.75 v65.5,13.75 | IC28.72 v63.75,25.5
STLINK_USART1_RX  (via drill 0.35)
  Route15 0.2: v65.5,15 65.5,24.25 67.25,26 v67.25,26.75
  Bottom 0.2: J2.3 66.85,15 v65.5,15 | IC28.69 67,27 v67.25,26.75
STLINK_USART1_TX  (via drill 0.35)
  Route15 0.2: v69,16 69,22 70,23 70,25.75 v68.25,27.5
  Bottom 0.2: IC28.68 v68.25,27.5 | J2.2 67.1,16 v69,16
VBAT
  Bottom 0.24: IC32.2 47.2,9.7 49.25,11.75 C18.P$1
  pour Bottom (isolate 0.24, no thermals): 51.7,6 51.7,10.6 50,10.6 50,6.75 50.7,6.75 50.7,6
  pour Bottom (no thermals): 51.7,9.8 51.7,14 48.9,14 48.9,12 46.5,10.8 46.5,9.8
VDD  (via drill 0.35)
  Route2 0.6: 41.3,17 v41.9,17.6 41.9,10 v41.3,9.4
  Bottom 0.24: IC32.8 41.5,9.2 v41.3,9.4
  Bottom 0.3: v51.75,19.25 51.75,20.21 C3.P$1 51.75,20.29 51.75,21 52,21.25 IC28.100 | IC28.75 66.75,24 67,23.75 67.71,23.75 C2.P$1 67.79,23.75 v68.75,23.75 | 48.29,29.25 C5.P$1 | C13.P$1 48.29,34.5 IC28.22 IC28.21 | C13.P$1 C14.P$1 v47,35.25 | C5.P$1 48.21,29.25 v47.25,29.25 | IC28.11 48.75,29 48.54,29.21 C5.P$1 | IC28.6 49.29,26.5 C7.P$1 48.21,25.5 v47.25,25.5 | C13.P$1 v48.25,35.25 | IC28.28 53,38.75 53.25,39 53.25,39.71 C4.P$1 53.25,39.79 v53.25,40.75 | IC28.50 64,38.75 64.25,39 64.25,39.71 C1.P$1 64.25,39.79 v64.25,40.75 | R48.P$2 4.25,50.05 v4.25,51.5 | R50.P$2 108.5,50.2 v108.5,51.5
  Bottom 0.5: R1.P$2 R3.P$2 9.25,47.45 v9.25,46 | R5.P$2 R7.P$2 13.25,47.45 v13.25,46 | R9.P$2 R11.P$2 17.25,47.45 v17.25,46 | R13.P$2 R15.P$2 21.25,47.45 v21.25,46 | R17.P$2 R19.P$2 25.25,47.45 v25.25,46 | R21.P$2 R23.P$2 29.25,47.45 v29.25,46 | R25.P$2 R27.P$2 33.25,47.45 v33.25,46 | R6.P$2 R8.P$2 37.25,47.45 v37.25,46 | R10.P$2 R12.P$2 41.25,47.45 v41.25,46 | R14.P$2 R16.P$2 45.25,47.45 v45.25,46 | R18.P$2 R20.P$2 49.25,47.45 v49.25,46 | R2.P$2 R4.P$2 53.25,47.45 v53.25,46 | R22.P$2 R24.P$2 57.25,47.45 v57.25,46 | R26.P$2 R28.P$2 61.25,47.45 v61.25,46 | R29.P$2 R31.P$2 65.25,47.45 v65.25,46 | R33.P$2 R35.P$2 69.25,47.45 v69.25,46 | R37.P$2 R39.P$2 73.25,47.45 v73.25,46 | R41.P$2 R43.P$2 77.25,47.45 v77.25,46 | R45.P$2 R46.P$2 81.25,47.45 v81.25,46 | R47.P$2 R49.P$2 85.25,47.45 v85.25,46 | R51.P$2 R52.P$2 89.25,47.45 v89.25,46 | R30.P$2 R32.P$2 93.25,47.45 v93.25,46 | R34.P$2 R36.P$2 97.25,47.45 v97.25,46 | R38.P$2 R40.P$2 101.25,47.45 v101.25,46 | R42.P$2 R44.P$2 105.25,47.45 v105.25,46
  Bottom 0.6: R68.P$1 v41.9,17.6 42.1,17.8 L1.2 43.85,19.35
  other vias: 41.9,18.8
  pour Bottom (no thermals): 43.5,16.5 40.5,16.5 40.5,19.5 43.5,19.5
  pour Route2: 111.5,59.5 111.5,36.5 71.5,36.5 71.5,16.5 40.5,16.5 40.5,36.5 0.5,36.5 0.5,59.5
WAKEUP  (via drill 0.35)
  Route15 0.2: v56.5,20.25 v56.5,24.25
  Bottom 0.2: J1.2 59.12,11.38 56.5,14 v56.5,20.25 | v56.5,24.25 54.75,26 IC28.5

## Text on the board
tNames: S1 | S25 | VAR1A REV 3.0 2019-10-06